# EAGLE board programmer dip (EAGLE 7.0.0)
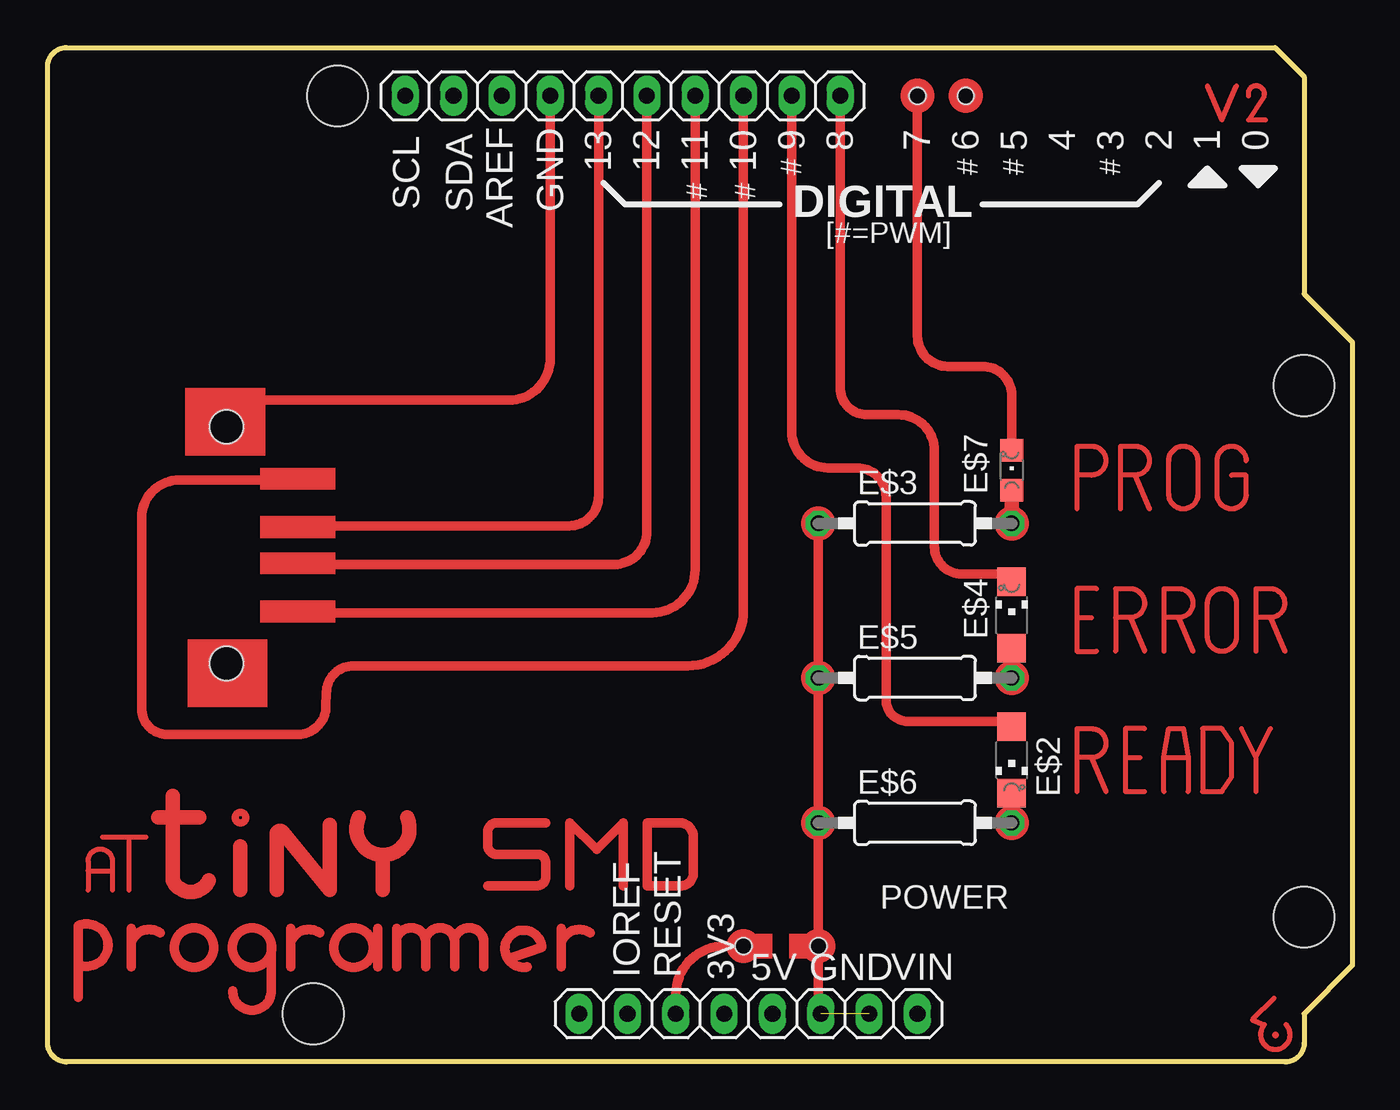
[diagram p0: board, top side]

Size 68.58 x 53.34 mm. Coordinates in mm from the lower left corner, seen from the top.
Outline: 64.52,53.34 66.04,51.82 66.04,40.39 68.58,37.85 68.58,5.08 66.04,2.54 66.04,1 arc-90 65.04,0 1,0 arc-90 0,1 0,52.34 arc-90 1,53.34 64.52,53.34
Copper layers (1*16): Top 0.035mm / dielectric 1.5mm / Bottom 0.035mm
Design rules "default": minimum track width 10mil, minimum drill 22mil, track to track 10mil, track to pad 10mil, pad to pad 10mil, via to via 12mil, smd to smd 8mil, copper to edge 26mil, drill to drill 12mil, minimum pad ring 10mil, minimum via ring 10mil, stop-mask expansion 1mil, vias tented up to drill 30mil, thermal gap 10mil
Net classes: 0 default: width 0.254 mm, clearance 0.254 mm; 1 power: width 0.61 mm, drill 0.61 mm, clearance 0.254 mm; 2 gnd: width 0.305 mm, drill 0.559 mm, clearance 0.254 mm; 3 usbvcc: width 0.508 mm, drill 0.61 mm, clearance 0.254 mm; 4 aref: width 0.406 mm, drill 0.61 mm, clearance 0.254 mm
Holes 3.2 mm at 66.04,35.56 66.04,7.62 15.24,50.8 13.97,2.54
Holes 0.86 mm at 45.72,50.8 48.26,50.8 36.58,6.1 40.51,6.1
Holes 1.78 mm at 9.4,20.95 9.4,33.4

## Footprints (pad centres in the part's own frame; a part is rotated, then mirrored left to right if it is on the bottom)
CHIPLED_1206 = smd 1.5 x 1.5: A 0,-1.75; C 0,1.75
0207/10 = drill 0.813 octagon: 1 -5.08,0; 2 5.08,0
CHIPLED_0805 = smd 1.2 x 1.2: A 0,-1.05; C 0,1.05
1X10@1 = drill 0.85 pad 1.422 long: 1 -11.43,0; 2 -8.89,0; 3 -6.35,0; 4 -3.81,0; 5 -1.27,0; 6 1.27,0; 7 3.81,0; 8 6.35,0; 9 8.89,0; 10 11.43,0
1X08 = drill 0.85 pad 1.422 long: 1 -8.89,0; 2 -6.35,0; 3 -3.81,0; 4 -1.27,0; 5 1.27,0; 6 3.81,0; 7 6.35,0; 8 8.89,0

## Placement (x,y rotation side)
E$2  [CHIPLED_1206]  50.67,15.88 180 top
E$3  [0207/10]  45.59,28.32 0 top
E$4  [CHIPLED_1206]  50.67,23.5 0 top
E$5  [0207/10]  45.59,20.19 0 top
E$6  [0207/10]  45.59,12.57 0 top
E$7  [CHIPLED_0805]  50.67,31.11 0 top
IOH  10x1F-H8.5  [1X10@1]  30.23,50.8 180 top
POWER  8x1F-H8.5  [1X08]  36.83,2.54 0 top

## Library data of the parts
E$2 E$4 E$7 = led
E$3 E$5 E$6 = resistor
IOH POWER = SmartPrj

## Nets
S$1: POWER.3
S$9: POWER.6 POWER.7
S$10: POWER.5
S$18: IOH.1
S$19: IOH.2
S$20: IOH.3
S$22: IOH.5
S$25: IOH.4
S$49: IOH.7

## Tracks (layer width: path | path; a pad name or v marks a point on that pad's centre or on a via)
S$2
  Top 0.254: 60.96,51.31 61.72,49.53 62.48,51.31
S$4
  Top 0.254: 64.01,49.53 63.12,49.53 63.88,50.67 arc228 63.12,50.8
S$5
  Top 0.762: 50.67,29.84 50.67,28.83
S$6
  Top 0.508: 33.02,3.3 33.02,3.55 arc-90 35.56,6.1 36.58,6.1
S$9  (1 unrouted)
  Top 0.508: POWER.6 40.51,2.29 40.51,12.19
S$11
  Top 0.254: 54.1,16 54.1,17.53 54.86,17.53 arc-180 54.86,16 | 54.1,16 54.1,14.22 | 54.86,16 54.1,16 | 54.86,16 55.63,14.22
S$14
  Top 0.508: 44.07,19.05 arc90 45.21,17.91 50.67,17.91
S$16
  Top 0.508: 26.19,12.57 23.6,12.57 arc90 23.14,12.12 23.14,11.38 arc90 23.6,10.92 25.73,10.92 arc-90 26.19,10.46 26.19,9.73 arc-90 25.73,9.27 23.14,9.27
S$17
  Top 0.508: 27.46,9.27 27.46,12.57 28.85,11.18 30.25,12.57 30.25,9.27
S$19
  Top 0.508: IOH.2 39.12,33.13 arc90 41,31.24 42.54,31.24 arc-90 44.07,29.71 44.07,19.09
S$20
  Top 0.508: IOH.3 36.58,23.75 arc-90 33.65,20.83 16.08,20.83 arc90 14.66,19.43 14.63,18.7 arc-90 13.17,17.22 6.28,17.22 arc-90 4.95,18.57 4.95,28.63 arc-90 6.93,30.61 12.95,30.61
S$21
  Top 0.508: 31.52,12.57 31.52,9.27 33.3,9.27 arc90 33.93,9.91 33.93,11.86 arc90 33.22,12.57 31.52,12.57
S$22
  Top 0.508: IOH.5 31.5,27.89 arc-90 29.77,26.16 13.84,26.16
S$23
  Top 0.254: 57.66,17.53 56.64,17.53 56.64,16 | 56.64,16 56.64,14.22 57.66,14.22 | 56.64,16 57.4,16
S$24
  Top 0.508: 26.42,47.37 26.42,36.98 arc-90 24.23,34.8 10.41,34.8 7.62,34.92
S$25
  Top 0.508: IOH.4 34.04,25.88 arc-90 31.77,23.62 13.34,23.62
S$26
  Top 0.254: 64.47,3.35 63.32,2.21 63.96,1.96 arc265 65.1,1.96
S$27
  Top 0.254: 3.4,10.06 3.4,10.57 arc180 2.13,10.57 2.13,10.06 | 3.4,10.06 3.4,9.04 | 2.13,10.06 2.13,9.04 | 2.13,10.06 3.4,10.06
S$28
  Top 0.254: 4.29,9.04 4.29,11.84
S$29
  Top 0.254: 2.9,11.84 5.18,11.84
S$30
  Top 0.762: 7.98,12.85 6.58,12.85 | 6.58,12.85 6.58,13.99 | 6.58,12.85 6.58,9.55 arc130 8.48,9.55 | 6.58,12.85 5.82,12.85
S$31
  Top 0.254: 58.67,14.22 58.67,16 | 58.67,16 58.93,17.53 59.69,17.53 59.94,16 | 59.94,16 59.94,14.22 | 58.67,16 59.94,16
S$32
  Top 0.254: 60.71,17.53 60.71,14.22 61.72,14.22 62.23,14.99 62.23,16.76 61.72,17.53 60.71,17.53
S$33
  Top 0.254: 62.74,17.53 63.5,16 | 63.5,16 64.26,17.53 | 63.5,16 63.5,14.22
S$34
  Top 0.254: 56.13,23.37 56.13,24.89 56.9,24.89 arc-180 56.9,23.37 | 56.13,23.37 56.13,21.59 | 56.9,23.37 56.13,23.37 | 56.9,23.37 57.66,21.59
S$35
  Top 0.254: 55.12,24.89 54.1,24.89 54.1,23.37 | 54.1,23.37 54.1,21.59 55.12,21.59 | 54.1,23.37 54.86,23.37
S$36
  Top 0.254: 58.67,23.37 58.67,24.89 59.44,24.89 arc-180 59.44,23.37 | 58.67,23.37 58.67,21.59 | 59.44,23.37 58.67,23.37 | 59.44,23.37 60.2,21.59
S$37
  Top 0.254: 63.5,23.37 63.5,24.89 64.26,24.89 arc-180 64.26,23.37 | 63.5,23.37 63.5,21.59 | 64.26,23.37 63.5,23.37 | 64.26,23.37 65.02,21.59
S$38
  Top 0.254: 60.96,24.13 arc-180 62.48,24.13 62.48,22.35 arc-180 60.96,22.35 60.96,24.13
S$39
  Top 0.254: 54.1,30.86 54.1,32.38 54.86,32.38 arc-180 54.86,30.86 54.1,30.86 | 54.1,30.86 54.1,29.08
S$40
  Top 0.254: 56.39,30.86 56.39,32.38 57.15,32.38 arc-180 57.15,30.86 | 56.39,30.86 56.39,29.08 | 57.15,30.86 56.39,30.86 | 57.15,30.86 57.91,29.08
S$41
  Top 0.254: 58.93,31.62 arc-180 60.45,31.62 60.45,29.84 arc-180 58.93,29.84 58.93,31.62
S$42
  Top 0.254: 62.99,31.62 arc180 61.47,31.62 61.47,29.84 arc180 62.99,29.84 62.99,30.86 62.23,30.86
S$43
  Top 0.508: 45.72,51.05 45.72,38.17 arc90 47.31,36.58 49.14,36.58 arc-90 50.67,35.05 50.67,32.64
S$44
  Top 0.508: 41.66,50.55 41.66,35.46 arc90 43.08,34.04 44.72,34.04 arc-90 46.61,32.15 46.61,27.1 arc90 48.06,25.65 50.8,25.65
S$45
  Top 0.508: 40.51,28.57 40.51,12.49
S$46
  Top 0.762: 10.13,11.33 10.13,9.04
S$49
  Top 0.508: 26.42,47.41 IOH.7
S$50
  Top 0.508: 28.96,51.05 28.96,29.74 arc-90 27.41,28.19 11.81,28.19
S$59
  Top 0.508: 1.6,7.16 1.6,3.4
S$60
  Top 0.508: 1.6,7.16 arc-229 1.6,5.13
S$61
  Top 0.508: 4.39,7.04 4.39,6.27 | 4.39,6.27 4.39,5 | 4.39,6.27 arc-108 5.92,6.78
S$62
  Top 0.508: 9.73,3.73 arc180 11.76,3.73 11.76,6.27
S$63
  Top 0.508: 12.78,7.04 12.78,6.27 | 12.78,6.27 12.78,5 | 12.78,6.27 arc-108 14.3,6.78 | 17.35,7.04 17.35,5 | 18.36,7.04 18.36,6.53 | 18.36,6.53 18.36,5 | 18.36,6.53 arc-162 19.89,6.27 19.89,5 | 19.89,6.53 arc-162 21.41,6.27 | 21.41,5 21.41,6.53 arc-162 22.94,6.27 22.94,5
S$64
  Top 0.508: 25.98,6.02 arc279 25.22,5
S$65
  Top 0.508: 25.98,6.02 24.46,5.51
S$66
  Top 0.508: 27,7.04 27,6.27 | 27,6.27 27,5 | 27,6.27 arc-108 28.52,6.78
S$67
  Top 0.762: 12.04,9.04 12.04,11.97 arc-141 12.36,12.08 14.83,9.04 14.83,12.47
S$68
  Top 0.762: 16.36,12.85 arc229 18.9,12.85
S$70
  Top 0.762: 17.63,10.82 17.63,9.04
(copper drawn outside any net)
  shapes: Top area x8, Top circle x15

## Text on the board
tPlace: 13 | 12 | 11 | 10 | 9 | 8 | 7 | 6 | 5 | 4 | 3 | 2 | 1 | 0
tNames: AREF | GND | # | # | # | # | SCL | SDA | # | # | DIGITAL | [#=PWM] | IOREF | RESET | 3V3 | 5V | GND | VIN
214bmp: D:/SmartProjects/Snc/a4_bn_logo2.bmp